# Altium PCB TC264.PcbDoc (part 2 of 2)
Units mil, origin at the board's own origin, x right, y up, seen from the top; angles counter-clockwise.
Board outline 6025.03 x 2675.03 mil, 2 copper layers (Top Layer, Bottom Layer); 160 components, 198 nets, 553 pads, 106 vias.
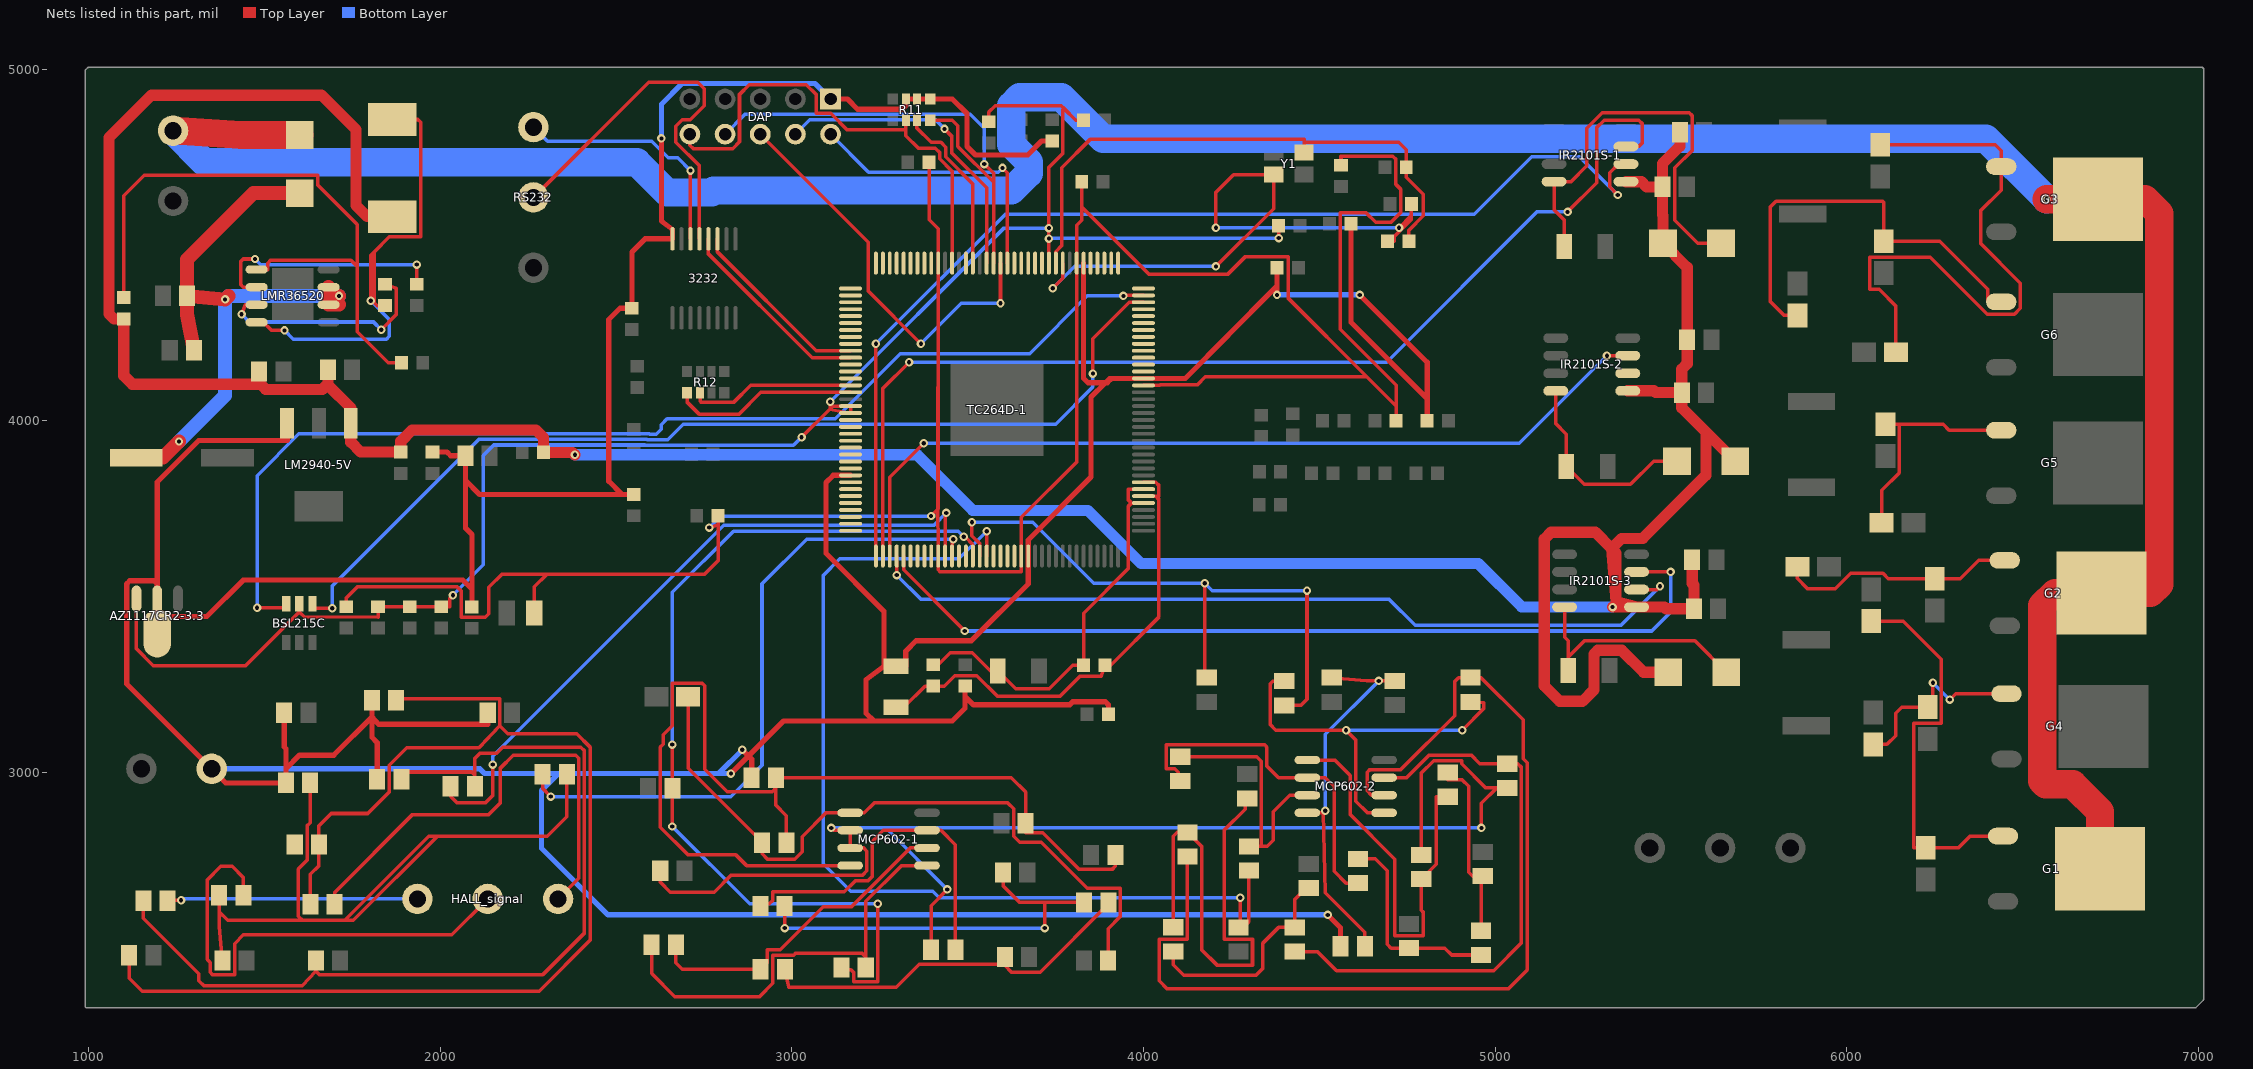
[diagram p2: the nets of this part, all layers, seen from the top]

## Via types
v1: diameter 24, hole 12, Top Layer to Bottom Layer, 106 vias

## Nets (pads, with @x,y where several pads share a name; then routed paths per layer and width w, separated by ;. In a path a pad name is that pad's centre, name@x,y a point inside that pad or via, vN(x,y) a via of type N, cw(c..) or ccw(c..) an arc to the next point about the centre after c; other vN are vias at no path point) (continued)
NetC15_2: C15.2 R1.1 TC264D-1.81 Y1.1 | length 1903.3
  Top Layer w10: v1(3742,4377) 3770.48,4405.48 TC264D-1.81@3770.48,4448.26 ; v1(4206,4439) 4370,4603 Y1.1@4370,4700 4256,4700 4206,4650 v1(4206,4549) ; R1.1@4694.37,4510 4713,4510 4713,4523.99 4762.01,4573 4762.01,4583.99 ; v1(4727.02,4549) 4762.01,4583.99 ; C15.2@4762.01,4616.5 4762.01,4583.99
  Bottom Layer w10: v1(3742,4377) 3804,4439 v1(4206,4439) ; v1(4206,4549) v1(4727.02,4549)
NetC16_2: C16.2 R1.2 TC264D-1.82 Y1.3 | length 1635.2
  Top Layer w10: TC264D-1.82@3750.79,4448.26 3750.79,4481 3768,4498.21 3768,4720 3848,4800 4456.61,4800 4456.61,4792 ; Y1.3@4456.61,4762.99 4456.61,4792 ; R1.2@4755,4510 4755,4542 4796,4583 4796,4644.32 4747.32,4693 C16.2@4747.32,4721.5 4747.32,4771 4726.32,4792 4456.61,4792
NetC53_1: C53.1 LMR36520.8 LV1.1 | length 1404.7
  Top Layer w10: LMR36520.8@1477.64,4280 1497,4280 1519,4258 1556,4258 v1(1557,4257) ; v1(1802,4341) 1802,4470 1812,4480 ; C53.1@1842.81,4327.44 1820.56,4327.44 1812,4336 1812,4480 ; LV1.1@1863.22,4856.74 1936,4856.74 1944,4848.74 1944,4523 1855,4523 1812,4480
  Bottom Layer w10: v1(1557,4257) 1582,4232 1847,4232 1855,4240 1855,4288 v1(1802,4341)
NetC53_2: C53.2 LMR36520.7 | length 646.7
  Top Layer w10: v1(1435,4302.65) 1445,4330 LMR36520.7@1477.64,4330 ; v1(1832,4259) 1875,4302 1875,4377.07 C53.2@1842.81,4388.07
  Bottom Layer w10: v1(1435,4302.65) 1456.83,4280.83 1810.17,4280.83 v1(1832,4259)
NetC54_2: C54.2 LMR36520.6 | length 679.7
  Top Layer w10: v1(1473,4460) 1440,4460 1432,4452 1432,4388 1440,4380 LMR36520.6@1477.64,4380 ; C54.2@1932.89,4388.07 v1(1932.89,4444)
  Bottom Layer w10: v1(1473,4460) 1489,4444 v1(1932.89,4444)
NetCD1_1: CD1.1 RD1.2 RD4.1 RD7.2 | length 2655.9
  Top Layer w10: RD4.1@1155.55,2635 1155.55,2585.45 1313.61,2427.39 1313.61,2407.39 1328,2393 1607.1,2393 1646.1,2434.9 ; CD1.1@1646.1,2465 1646.1,2434.9 ; RD1.2@1889.45,2980 1889.45,3001 2089.46,3001 2098.46,2992 ; RD7.2@2098.46,2960.79 2098.46,2992 ; 1646.1,2434.9 1656,2425 2292,2425 2410,2543 2410,3061 2400,3071 2178,3071 2161,3054 2113,3054 2098.46,3039.46 2098.46,2992
NetCD2_1: CD2.1 RD2.2 RD5.1 RD8.2 | length 2200.5
  Top Layer w10: RD5.1@1371.1,2650 1371.1,2603 ; CD2.1@1380.55,2465 1371.1,2561.45 1371.1,2603 ; RD2.2@1630,2970 1630,2857 1621,2848 1621,2750 1596,2725 1596,2591 1608,2579 ; RD8.2@2360,2995 2360,2874 2304,2818 1992,2818 ; 1371.1,2603 1395.1,2579 1608,2579 ; 1608,2579 1728,2579 ; 1728,2579 1967,2818 1992,2818 ; 1728,2579 1753,2579 1992,2818
NetCD3_1: CD3.1 RD3.2 RD6.1 RD9.2 | length 3572.2
  Top Layer w10: CD3.1@1115,2480 1115,2414 1152,2377 2281,2377 2426,2522 2426,3072 2388,3110 2192,3110 2169,3133 ; RD6.1@1630.55,2625 1630.55,2710 1655,2734.45 RD9.2@1655,2795 1655,2848 1690,2883 1794,2883 1855,2944 1855,3020 1904.77,3069.77 2110,3069.77 2169,3133 ; RD3.2@1874.45,3205 1874.45,3210 2169,3210 2169,3133
NetCM1_2: CM1.2 CM2.2 LM1.2 MCP602-1.8 RM1.2 | length 2948.5
  Top Layer w10: RM1.2@2984.45,2800 2984.45,2877 2954.45,2907 2954.45,2955.45 ; MCP602-1.8@3165.75,2735 2871,2735 2841,2765 2705,2765 2626,2844 2626,3072 2634,3080 2634,3107 2660,3133 2660,3254 2744,3254 2752,3246 2752,3009 2816,2945 2944,2945 2954.45,2955.45 ; CM1.2@3920,2765 3920,2733 3912,2725 3816,2725 3713,2828 3665,2828 CM2.2@3665,2855 3665,2944 3624,2985 LM1.2@2954.45,2985 2954.45,2955.45
NetCM3_2: CM3.2 MCP602-1.5 RM1.1 RM2.2 | length 2015.7
  Top Layer w10: CM3.2@2705,3215 2705,3011.45 2915.55,2800.9 RM1.1@2915.55,2800 2915.55,2768 2930.54,2753.01 3008,2753.01 3029.01,2774.03 3029.01,2817.01 3097,2885 MCP602-1.5@3165.75,2885 3206,2885 3234,2913 3614,2913 3631,2896 3631,2818 3648,2801 3709,2801 3840,2670 3933.84,2670 3933.84,2590.06 3899.45,2555.67 RM2.2@3899.45,2465
NetCM4_1: CM4.1 RM6.1 RM7.2 | length 1163.3
  Top Layer w10: v1(2979.45,2557) RM7.2@2979.45,2620 ; RM6.1@3600.55,2715 3600.55,2677.45 3648,2630 3719,2630 ; v1(3719,2557) 3719,2630 ; CM4.1@3831.1,2630 3719,2630
  Bottom Layer w10: v1(2979.45,2557) v1(3719,2557)
NetCM4_2: CM4.2 RM3.1 RM4.2 | length 1128.6
  Top Layer w10: RM4.2@2980,2440 2990.94,2389.06 3297.06,2389.06 3362,2454 RM3.1@3605.55,2454 ; CM4.2@3900,2630 3900,2625.45 3706.55,2432 3624.55,2432 RM3.1@3605.55,2451 ; RM3.1@3605.55,2451 RM3.1@3605.55,2475 RM3.1@3605.55,2454 ; RM3.1@3605.55,2451 RM3.1@3605.55,2454
NetCM11_2: CM11.2 CM12.2 LM2.2 MCP602-2.8 | length 1092.8
  Top Layer w10: MCP602-2.8@4465.75,2885 v1@4511,2885 ; v1(4517,2891) v1@4511,2885 ; CM11.2@4535,3269.45 4634.45,3260 v1(4669,3260) CM12.2@4715,3260 ; LM2.2@4629.45,2505 4629.45,2545 4517,2657.45 v1@4511,2885
  Bottom Layer w10: v1(4517,2891) 4517,3108 v1(4669,3260)
NetCM13_1: CM13.1 RM18.1 RM19.2 | length 585.7
  Top Layer w10: RM19.2@4610,2753.9 4659.1,2753.9 4693,2720 4693,2511 4704,2500 RM18.1@4755,2500 4857,2500 4876.45,2480.55 CM13.1@4960,2480.55
NetCM13_2: CM13.2 RM21.1 RM22.2 | length 532.4
  Top Layer w10: RM22.2@4865,2999.45 4865,2979 4906,2979 4925,2960 4925,2716 4936,2705 RM21.1@4960,2705 ; CM13.2@4960,2549.45 RM21.1@4960,2705 ; RM21.1@4965,2705 RM21.1@4960,2705
NetCM14_1: CM14.1 RM14.1 RM15.2 | length 625.7
  Top Layer w10: CM14.1@4085,2490.55 4085,2453 4114.62,2423.38 4320,2423.38 4339.72,2443.1 4339.72,2514.62 4384,2558.9 RM15.2@4430,2558.9 4430,2638.41 4462.15,2670.55 RM14.1@4470,2670.55
NetCM14_2: CM14.2 RM11.1 RM12.2 | length 1401.3
  Top Layer w10: CM14.2@4085,2559.45 4085,2818.45 4096,2829.45 RM12.2@4125,2829.45 4165,2789.45 4165,2496 4209,2452 4310,2452 4310,2525 4230.06,2525 4230.06,2836.06 4289,2895 4289,2926.1 RM11.1@4295,2926.1
NetCR3_1: CR3.1 DR1.2 IR2101S-1.8 | length 1213.3
  Top Layer w10: CR3.1@5196.34,4495 5196.34,4571.03 5167.64,4599.73 IR2101S-1.8@5167.64,4680 5216,4680 5261,4725 5261,4832 5305,4876 5552,4876 5560,4868 5560,4768 5511,4719 5511,4570 5576,4505 DR1.2@5642.68,4505
NetCR6_1: CR6.1 DR2.2 IR2101S-2.8 | length 590.5
  Top Layer w10: IR2101S-2.8@5172.64,4085 5172.64,3992.04 5202.68,3962 CR6.1@5202.68,3870 5253.68,3819 5385,3819 5451,3885 DR2.2@5517.32,3885
NetCR9_1: CR9.1 DR3.2 IR2101S-3.8 | length 690.3
  Top Layer w10: IR2101S-3.8@5197.64,3470 5197.64,3384.35 5207.99,3374 5207.99,3328 ; CR9.1@5207.99,3289.8 5207.99,3328 ; DR3.2@5657.68,3285 5568.45,3374.23 5254.22,3374.23 5207.99,3328
NetG1_1: G1.1 RW1.1 RW2.2 | length 1125.4
  Top Layer w10: RW1.1@6070,3430 6161,3430 6269,3322 6269,3140 6191,3140 6191,2785.55 RW2.2@6225,2785.55 6318,2785.55 6351.32,2818.87 G1.1@6444.45,2818.87
NetG2_1: G2.1 RW3.1 RW4.2 | length 681.5
  Top Layer w10: RW3.1@5859.45,3585 5859.45,3551.55 5888.43,3522.57 5967.57,3522.57 6011,3566 6103,3566 6118.45,3550.55 RW4.2@6250,3550.55 6323,3550.55 6375.41,3602.96 G2.1@6449.41,3602.96
NetG3_1: G3.1 RW5.1 RW6.2 | length 1688.7
  Top Layer w10: RW6.2@6095,4785 6422.41,4785 6439.41,4768 G3.1@6439.41,4722.96 6439,4722.96 6439,4656 6381,4598 6381,4504 6494,4391 6494,4320 6477,4303 6400,4303 6238,4465 6066,4465 6066,4374 6092,4374 6140,4326 RW5.1@6140,4195
NetG4_1: G4.1 RW7.1 RW8.2 | length 557.2
  Top Layer w10: RW7.1@6075,3079.45 6114.45,3079.45 6139,3104 6139,3168 6156.55,3185.55 RW8.2@6230,3185.55 6245,3185.55 v1(6245,3255) ; v1(6293,3207) 6309.87,3223.87 G4.1@6454.45,3223.87
  Bottom Layer w10: v1(6245,3255) v1(6293,3207)
NetG5_1: G5.1 RW9.1 RW10.2 | length 637
  Top Layer w10: RW9.1@6099.45,3710 6099.45,3802 6149,3851.55 6149,3990 ; RW10.2@6110,3990 6149,3990 ; G5.1@6439.41,3972.96 6291.04,3972.96 6274,3990 6149,3990
NetG6_1: G6.1 RW11.1 RW12.2 | length 1230
  Top Layer w10: RW11.1@5860,4299.45 5822.55,4299.45 5783,4339 5783,4608 5799,4624 6102,4624 6105,4621 RW12.2@6105,4510.55 6265,4510.55 6401.1,4374.45 6401.1,4337.96 G6.1@6439.41,4337.96
NetHALL_signal_1: HALL_signal.1 RD6.2 | length 1375.9
  Top Layer w10: RD6.2@1699.45,2625 1699.45,2658.45 1921,2880 2138,2880 2170,2912 2170,3011 2208,3049 2385,3049 2394,3040 2394,2699 HALL_signal.1@2335,2640
NetHALL_signal_2: HALL_signal.2 RD5.2 | length 1382.2
  Top Layer w10: RD5.2@1440,2650 1440,2701 1408,2733 1376,2733 1337,2694 1337,2467.8 1345.61,2459.2 1345.61,2431.39 1352,2425 1415,2425 1415,2513 1440,2538 2033,2538 HALL_signal.2@2135,2640
NetHALL_signal_3: HALL_signal.3 RD4.2 | length 713.2
  Top Layer w10: RD4.2@1224.45,2635 1224.45,2636 v1(1263,2636)
  Bottom Layer w10: v1(1263,2636) 1267,2640 HALL_signal.3@1935,2640
NetLMR36520_5: LMR36520.5 R51.1 R52.2 | length 1833.8
  Top Layer w10: R52.2@1100,4350 1100,4640 1158,4698 1651,4698 1651,4671 1764,4558 1764,4438 ; LMR36520.5@1477.64,4430 1509,4430 1509,4448 1517,4456 1746,4456 1764,4438 ; R51.1@1889.37,4165 1852,4165 1764,4253 1764,4438
NetMCP602-1_1: MCP602-1.1 RM5.1 RM9.2 | length 1224.7
  Top Layer w10: RM5.1@2601.1,2510 2601.1,2428 2667.1,2362 2908,2362 2946,2400 2946,2479.94 3005,2479.94 3010.06,2485 3200,2485 3210,2475 ; RM9.2@3210,2445 3210,2475 ; MCP602-1.1@3384.25,2735 3312,2735 3210,2633 3210,2475
NetMCP602-1_2: MCP602-1.2 RM4.1 RM5.2 | length 938.6
  Top Layer w10: RM5.2@2670,2510 2670,2458 2688,2440 RM4.1@2911.1,2440 2929.55,2458.45 2929.55,2495.94 2967.04,2495.94 3088.87,2617.77 3169.58,2617.77 3336.81,2785 MCP602-1.2@3384.25,2785
NetMCP602-1_3: MCP602-1.3 RM7.1 RM8.2 | length 1036.3
  Top Layer w10: RM7.1@2910.55,2620 2910.55,2626 2936,2626 2945,2635 2945,2659.94 3148.94,2659.94 3180.11,2691.11 3216.27,2691.11 3229.17,2704 3229.17,2804.17 3260,2835 MCP602-1.3@3384.25,2835 3424,2835 3465,2794 RM8.2@3465,2495
NetMCP602-2_1: MCP602-2.1 RM13.1 RM17.2 | length 1160.5
  Top Layer w10: RM17.2@4400,3259.45 4368,3259.45 4360,3251.45 4360,3136 4376,3120 v1(4576,3120) 4604,3092 4604,2918 4637,2885 MCP602-2.1@4684.25,2885 ; v1(4906.45,3120) 4968,3181.55 4968,3197.55 RM13.1@4930,3200.55
  Bottom Layer w10: v1(4576,3120) v1(4906.45,3120)
NetMCP602-2_2: MCP602-2.2 RM12.1 RM13.2 | length 2995.7
  Top Layer w10: RM12.1@4125,2760.55 4125,2525 4045,2525 4045,2407 4068,2384 5037,2384 5091,2438 5091,3027.53 5080,3038.53 5080,3149.45 4960,3269.45 RM13.2@4930,3269.45 4896,3269.45 4885,3258.45 4885,3161 4732,3008 4644,3008 4636,3000 4636,2947.59 4648.59,2935 MCP602-2.2@4684.25,2935
NetMCP602-2_3: MCP602-2.3 RM15.1 RM16.2 | length 1631
  Top Layer w10: RM15.1@4430,2490 4495,2490 4549,2436 4996,2436 5075,2515 5075,3013.87 5064.43,3024.45 RM16.2@5035,3024.45 4956.55,3024.45 4931.72,3049.28 4812.28,3049.28 4748,2985 MCP602-2.3@4684.25,2985
NetMCP602-2_5: MCP602-2.5 RM22.1 RM23.1 | length 1176.5
  Top Layer w10: MCP602-2.5@4465.75,3035 4544,3035 4588,2991 4588,2880 4715,2753 4715,2535 4795,2535 4795,2603 4790,2608 RM23.1@4790,2696.1 4833,2739.1 4833,2930.55 RM22.1@4865,2930.55
NetMCP602-2_6: MCP602-2.6 RM19.1 RM20.1 | length 1017.1
  Top Layer w10: RM20.1@4105,2975.55 4099,2975.55 4099,3000 4088.39,3010.61 4065.06,3010.61 4065.06,3078.28 4344.72,3078.28 4351,3072 4351,3018 4384,2985 MCP602-2.6@4465.75,2985 4517,2985 4542,2960 4542,2719 4576,2685 RM19.1@4610,2685
NetMCP602-2_7: MCP602-2.7 RM20.2 RM24.2 | length 751.5
  Top Layer w10: RM20.2@4105,3044.45 4322.55,3044.45 4335,3032 4335,2789.45 ; RM24.2@4300,2789.45 4335,2789.45 ; MCP602-2.7@4465.75,2935 4416,2935 4369,2888 4369,2806.45 4352,2789.45 4335,2789.45
NetR11_3: R11.3 TC264D-1.94 | length 488.4
  Top Layer w10: R11.3@3355.75,4854.69 3355.75,4832.25 3396.36,4791.64 3424,4791.64 3437.4,4778.24 3437.4,4750.6 3514.57,4673.43 TC264D-1.94@3514.57,4448.26
P00_3: TC264D-1.14
P00_7: TC264D-1.18
P00_8: TC264D-1.19
P00_9: TC264D-1.20
P00_12: TC264D-1.21
P02_0: IR2101S-1.2 TC264D-1.1 | length 3108.6
  Top Layer w10: TC264D-1.1@3238.98,3615.2 v1(3238.98,4218.98) ; v1(5349,4642) 5325.93,4665.07 5325.93,4704.93 5351,4730 IR2101S-1.2@5372.36,4730
  Bottom Layer w10: v1(3238.98,4218.98) 3607.37,4587.37 4940.37,4587.37 5104,4751 5240,4751 v1(5349,4642)
P02_1: IR2101S-1.3 TC264D-1.2 | length 3153.8
  Top Layer w10: TC264D-1.2@3258.67,3615.2 3258.67,4091.87 v1(3333.41,4166.61) ; v1(5206,4594) 5289,4677 5289,4834 5310,4855 5408,4855 5419,4844 5419,4791 5408,4780 IR2101S-1.3@5372.36,4780
  Bottom Layer w10: v1(3333.41,4166.61) 4691.61,4166.61 5119,4594 v1(5206,4594)
P02_6: TC264D-1.7
P02_7: TC264D-1.8
P02_8: TC264D-1.9
P10_1: TC264D-1.140
P10_2: TC264D-1.141
P10_3: TC264D-1.142
P10_5: TC264D-1.143
P10_6: TC264D-1.144
P11_2: TC264D-1.132
P11_3: TC264D-1.133
P11_6: TC264D-1.134
P11_9: TC264D-1.135
P11_10: TC264D-1.137
P11_11: TC264D-1.138
P11_12: TC264D-1.139
P13_0: TC264D-1.128
P13_1: TC264D-1.129
P13_2: TC264D-1.130
P13_3: TC264D-1.131
P14_0: 3232.11 TC264D-1.118 | length 532.1
  Top Layer w10: 3232.11@2788.39,4517.2 2788.39,4480 3069.34,4199.05 TC264D-1.118@3166.94,4199.05
P14_1: 3232.12 TC264D-1.119 | length 569.3
  Top Layer w10: 3232.12@2762.8,4517.2 2762.8,4474.2 3057.63,4179.37 TC264D-1.119@3166.94,4179.37
P14_2: TC264D-1.120
P14_3: TC264D-1.121
P14_4: TC264D-1.122
P14_5: R12.6 TC264D-1.123 | length 473.7
  Top Layer w10: R12.6@2739.25,4079.68 2739.25,4055.02 2742.27,4052 2834,4052 2882.63,4100.63 TC264D-1.123@3166.94,4100.63
P14_6: R12.5 TC264D-1.124 | length 531.4
  Top Layer w10: R12.5@2701.85,4079.68 2701.85,4053.15 2736,4019 2850,4019 2911.94,4080.94 TC264D-1.124@3166.94,4080.94
P15_0: TC264D-1.109
P15_1: TC264D-1.110
P15_2: TC264D-1.111
P15_3: TC264D-1.112
P15_4: TC264D-1.113
P15_5: TC264D-1.114
P15_6: TC264D-1.115
P15_7: TC264D-1.116
P15_8: TC264D-1.117
P20_3: TC264D-1.95
P20_6: TC264D-1.100
P20_7: TC264D-1.101
P20_8: TC264D-1.102
P20_9: TC264D-1.103
P20_10: TC264D-1.104
P20_11: TC264D-1.105
P20_12: TC264D-1.106
P20_13: TC264D-1.107
P20_14: TC264D-1.108
P21_2: TC264D-1.84
P21_3: TC264D-1.85
P21_4: TC264D-1.86
P21_5: TC264D-1.87
P21_6: TC264D-1.88
P22_0: TC264D-1.74
P22_1: TC264D-1.75
P22_2: TC264D-1.76
P22_3: TC264D-1.77
P23_1: TC264D-1.73
P32_4: TC264D-1.72
P33_4: TC264D-1.60
P33_5: TC264D-1.61
P33_6: TC264D-1.62
P33_7: TC264D-1.63
P33_8: TC264D-1.64
P33_9: TC264D-1.65
P33_10: TC264D-1.66
P33_11: TC264D-1.67
P33_12: TC264D-1.68
P33_13: TC264D-1.69
P_SCI0_RX: 3232.13 RS232.2 | length 1131.8
  Top Layer w10: RS232.2@2265,4635 2593,4963 2732,4963 2751,4944 2751,4896 2711,4856 2688,4856 2669.47,4837.47 2669.47,4792.53 2737.2,4724.8 3232.13@2737.2,4517.2
P_SCI0_TX: 3232.14 RS232.1 | length 692
  Top Layer w10: 3232.14@2711.61,4517.2 v1(2711.61,4711.39)
  Bottom Layer w10: RS232.1@2265,4835 2305,4795 2601,4795 2648,4748 2675,4748 v1(2711.61,4711.39)
PAD01: CM5.2 RM9.1 TC264D-1.15 | length 2675.3
  Top Layer w10: v1(2660,2846) CM5.2@2660,2955 v1(2660,3079) ; RM9.1@3141.1,2445 3141.1,2439 3168,2439 3176.16,2430.84 3176.16,2405.06 3244,2405.06 v1(3244,2626) ; v1(3489,3670) 3492.57,3670 3514.57,3648 TC264D-1.15@3514.57,3615.2
  Bottom Layer w10: v1(2660,2846) 2880,2626 v1(3244,2626) ; v1(2660,3079) 2660,3512.03 2833.97,3686 3473,3686 v1(3489,3670)
PAD02: CM15.2 RM17.1 TC264D-1.16 | length 1794.4
  Top Layer w10: v1(3512,3711) 3512,3673.2 3534.26,3650.94 TC264D-1.16@3534.26,3615.2 ; v1(4174,3538) 4174,3269.45 CM15.2@4180,3269.45 ; RM17.1@4400,3190.55 4448,3190.55 4465,3207.55 v1(4465,3517)
  Bottom Layer w10: v1(3512,3711) 3685,3711 3858,3538 v1(4174,3538) 4195,3517 v1(4465,3517)
PAD03: CM16.2 RM24.1 TC264D-1.17 | length 2900
  Top Layer w10: TC264D-1.17@3553.94,3615.2 v1(3553.94,3686) ; CM16.2@4270,2558.9 CM16.2@4275,2558.9 ; v1(4275,2643.18) CM16.2@4275,2558.9 ; RM24.1@4300,2720.55 4300,2575.95 4282.95,2558.9 CM16.2@4275,2558.9
  Bottom Layer w10: v1(3553.94,3686) 3474.94,3607 3136,3607 3089,3560 3089,2740 3167,2662 3400.18,2662 3419,2643.18 v1(4275,2643.18)
PORST: DAP.10 R11.2 TC264D-1.97 | length 1377.8
  Top Layer w10: DAP.10@2710,4815 2710,4784 2720,4774 2832,4774 2851,4793 2851,4928 2879,4956 3041,4956 3069,4928 3069,4874 3110,4874 3157,4827 3324.25,4827 ; R11.2@3324.25,4854.69 3324.25,4827 ; TC264D-1.97@3455.52,4448.26 3455.52,4709.85 3420,4745.37 3420,4763 3408,4775 3360,4775 3324.25,4810.75 3324.25,4827
PT0: RD7.1 TC264D-1.11 | length 1977.5
  Top Layer w10: RD7.1@2029.57,2960.79 2029.57,2931.43 2048,2913 2128,2913 2149,2934 v1(2149,3022) ; TC264D-1.11@3435.83,3615.2 3435.83,3734.66 v1(3439,3737.83)
  Bottom Layer w10: v1(2149,3022) 2149,3045.71 2806.29,3703 3404.17,3703 v1(3439,3737.83)
PT1: RD8.1 TC264D-1.12 | length 1873.2
  Top Layer w10: RD8.1@2291.1,2995 2291.1,2953.9 v1(2314,2931) ; TC264D-1.12@3455.52,3615.2 3455.52,3659.52 v1(3459,3663)
  Bottom Layer w10: v1(2314,2931) 2826.03,2931 2915,3019.97 2915,3536 3042,3663 v1(3459,3663)
PT2: RD9.1
PT3: TC264D-1.13
PWM2: IR2101S-2.2
PWM3: IR2101S-2.3 TC264D-1.3 | length 2466.3
  Top Layer w10: TC264D-1.3@3278.35,3615.2 3278.35,3839.35 v1(3375,3936) ; v1(5318,4185) IR2101S-2.3@5377.36,4185
  Bottom Layer w10: v1(3375,3936) 5069,3936 v1(5318,4185)
PWM4: IR2101S-3.2 TC264D-1.4 | length 2400.7
  Top Layer w10: v1(3298.04,3561) TC264D-1.4@3298.04,3615.2 ; IR2101S-3.2@5402.36,3520 5460,3520 v1(5469,3529)
  Bottom Layer w10: v1(3298.04,3561) 3366.04,3493 4698,3493 4773,3418 5358,3418 v1(5469,3529)
PWM5: IR2101S-3.3 TC264D-1.5 | length 2525.6
  Top Layer w10: TC264D-1.5@3317.72,3615.2 3317.72,3576 v1(3491.72,3402) ; IR2101S-3.3@5402.36,3570 v1(5499,3570)
  Bottom Layer w10: v1(3491.72,3402) 5445,3402 5499,3456 v1(5499,3570)
PWM6: TC264D-1.6
REF_2.5V: CM6.1 MCP602-1.6 MCP602-1.7 RM8.1 RM16.1 RM23.2 | length 3820.2
  Top Layer w10: CM6.1@2625.55,2720 2625.55,2688 2654.55,2659 2779,2659 2828,2708 3201.17,2708 3213.17,2720 3213.17,2776 3204.17,2785 MCP602-1.7@3165.75,2785 MCP602-1.6@3165.75,2835 3119,2835 v1(3112,2842) ; RM8.1@3396.1,2495 3396.1,2621.1 v1(3442,2667) ; RM23.2@4790,2765 4790,2998.28 4825,3033.28 4905,3033.28 4905,3024 4973.45,2955.55 5004.55,2955.55 ; v1(4961,2842) 4961,2912 5004.55,2955.55 ; RM16.1@5035,2955.55 5004.55,2955.55
  Bottom Layer w10: v1(3112,2842) 3267,2842 ; v1(3442,2667) 3267,2842 ; v1(4961,2842) 3267,2842
TCK: DAP.4 TC264D-1.92 | length 882.8
  Top Layer w10: v1(3434,4830) 3454.03,4809.97 3454.03,4762.39 3553.94,4662.48 TC264D-1.92@3553.94,4448.26
  Bottom Layer w10: DAP.4@3010,4815 3050.53,4855.53 3408.47,4855.53 v1(3434,4830)
TDO: DAP.6 TC264D-1.90 | length 1173.5
  Top Layer w10: DAP.6@2910,4815 3217,4508 3217,4369 v1(3367,4219) ; v1(3593.31,4334) TC264D-1.90@3593.31,4448.26
  Bottom Layer w10: v1(3367,4219) 3482,4334 v1(3593.31,4334)
TMS: DAP.2 TC264D-1.89 | length 815.2
  Top Layer w10: v1(3599,4719) 3613,4705 TC264D-1.89@3613,4448.26
  Bottom Layer w10: DAP.2@3110,4815 3218,4707 3587,4707 v1(3599,4719)
TRST: DAP.8 R11.4 TC264D-1.91 | length 1459.6
  Top Layer w10: R11.4@3393.15,4854.69 3456.31,4854.69 3472,4839 3472,4780 3573.63,4678.37 ; v1(3547,4730) 3573.63,4703.37 3573.63,4678.37 ; TC264D-1.91@3573.63,4448.26 3573.63,4678.37
  Bottom Layer w10: DAP.8@2810,4815 2866.53,4871.53 3507.47,4871.53 3547,4832 v1(3547,4730)
"VC 1V3": C1.1 C2.2 C3.2 C4.2 C8.1 CW6.2 L11.2 TC264D-1.10 TC264D-1.22 TC264D-1.58 TC264D-1.79 TC264D-1.99 | length 8733.9
  Top Layer w10: CW6.2@1732.87,3470.94 1732.87,3496 1764.13,3527.25 2048,3527.25 2059,3516.25 2059,3441 2128,3441 2138.04,3451.04 2138.04,3526.04 2176,3564 2304,3564 ; L11.2@2267.4,3452.76 2267.4,3527.4 2304,3564 ; v1(2765,3696) 2790,3704 ; C4.2@3390.32,4735 3390.32,4571.68 3416.15,4545.85 TC264D-1.99@3416.15,4448.26 ; v1(3396,3729) 3414.99,3747.99 ; C8.1@3824.37,4680 3824.37,4608 ; TC264D-1.58@4000,4100.63 4045.82,4100.63 4047,4101.81 4152.81,4101.81 4176,4125 4635,4125 ; C3.2@4561.69,4726.5 4561.69,4752.69 4709.31,4752.69 4718,4744 4718,4672 4731,4659 4731,4591.62 4704,4564.62 4660.38,4564.62 4634,4591 4560,4591 4560,4260 4718.58,4101.42 4718.58,4041.42 ; C2.2@4718.58,3999.96 4718.58,4041.42 ; 2304,3564 2752,3564 2790,3602 ; 2790,3602 C1.1@2790,3730 2790,3704 ; 2790,3602 2790,3704 ; 3414.99,3747.99 TC264D-1.99@3416.15,4448.26 ; 3414.99,3747.99 3416.15,3642.88 TC264D-1.10@3416.15,3615.2 3416.15,3575.85 3421,3571 3652.37,3571 TC264D-1.22@3652.37,3615.2 3652.37,3725.19 3809.85,3882.67 TC264D-1.79@3809.85,4448.26 3809.85,4556 3824.37,4570.52 3824.37,4608 ; 3414.99,3747.99 3416.15,3749.15 TC264D-1.99@3416.15,4448.26 ; 3824.37,4608 4016.37,4416 4239,4416 4290,4467 4411,4467 4411,4349 4635,4125 ; 4635,4125 4718.58,4041.42
  Bottom Layer w10: v1(2765,3696) 2798,3729 v1(3396,3729)
"VC 3V3": AZ1117CR2-3.3.3 BSL215C.2 C5.2 C6.1 C7.1 CW5.2 CW11.2 CW12.2 TC264D-1.83 TC264D-1.126 TC264D-1.127 | length 5145
  Top Layer w10: AZ1117CR2-3.3.3@1135.94,3493.94 1135.94,3351.06 1184,3303 1446.09,3303 1599.09,3456 ; BSL215C.2@1599.09,3479.35 1599.09,3456 ; v1(2036,3504) 2027,3495 2027,3470.94 CW11.2@2003.11,3470.94 CW12.2@1913.03,3470.94 CW5.2@1822.95,3470.94 1822.95,3441 1613,3442.09 1599.09,3456 ; v1(3027.43,3953) 3109,4034.57 ; v1(3109,4053.89) 3109,4034.57 ; C5.2@3560,4850.32 3560,4878 3577.95,4895.95 3766.05,4895.95 3774.03,4887.97 ; TC264D-1.83@3731.11,4448.26 v1(3731.11,4518) v1(3731.11,4548) 3731.11,4721.11 3771,4761 3771,4884.95 3774.03,4887.97 ; C6.1@3829.29,4854.96 3807.04,4854.96 3774.03,4887.97 ; v1(4384.37,4519.63) C7.1@4384.37,4555 ; 3109,4034.57 3116,4041.57 TC264D-1.126@3166.94,4041.57 TC264D-1.127@3166.94,4021.89 3109,4032 3109,4034.57
  Bottom Layer w10: v1(2036,3504) 2122,3590 2122,3901 2152,3931 2581.22,3931 2582.22,3930 3004.43,3930 v1(3027.43,3953) ; v1(3109,4053.89) 3603.11,4548 v1(3731.11,4548) ; v1(3731.11,4518) 3732.74,4519.63 v1(4384.37,4519.63)
"VC 5V": 3232.16 AZ1117CR2-3.3.2 C9.1 C10.1 C11.2 C13.1 C21.1 C22.1 CD4.1 CD5.1 CW3.1 CW4.2 CW10.2 DAP.1 HALL_PWR.2 LB2.2 LM1.1 LM2.1 LM2940-5V.3 R11.5 R11.6 R11.7 RD1.1 RD2.1 RD3.1 TC264D-1.23 TC264D-1.59 TC264D-1.78 TC264D-1.136 TX_C_1.2 TX_C_5.2 | length 17632.7
  Top Layer w15: AZ1117CR2-3.3.2@1195,3395.51 1195,3442 AZ1117CR2-3.3.2@1195,3443 ; CD5.1@1556.1,3170 1556.1,3072 1561.1,3067 1561.1,3010.1 ; LM2940-5V.3@1564.45,3993.11 1564.45,3944 1313,3944 1195,3826 1195,3536 ; RD3.1@1805.55,3205 1805.55,3157.55 ; RD1.1@1820.55,2980 1820.55,3085 1805.55,3100 1805.55,3157.55 ; CW4.2@1977.84,3910.94 2019,3910.94 2029.63,3900.31 CW3.1@2071.46,3900.31 2071.46,3830.86 ; CW10.2@2090,3470.32 2090,3521 ; CD4.1@2135,3170 2135,3137 1824,3137 1805.55,3157.55 ; TX_C_1.2@2550,3790.32 2517,3790.32 ; v1(2629,4803) 2629,4568 2660.43,4544 3232.16@2660.43,4517.2 2582.2,4517.2 2545,4480 TX_C_5.2@2545,4320 2511.21,4320 2479.21,4288 2479.21,3828.11 2517,3790.32 ; v1(2826.5,2996.5) 2876.5,3046.5 ; LM1.1@2885.55,2985 2885.55,3037.45 ; DAP.1@3110,4915 3158,4915 3187,4886 3314.25,4886 3324.25,4896 R11.7@3324.25,4915.32 R11.6@3355.75,4915.32 R11.5@3393.15,4915.32 3456,4915.32 3498,4873.32 3498,4780.16 3522.16,4756 3670.69,4756 3710,4795.31 C13.1@3740.2,4795.31 ; TC264D-1.136@3166.94,3844.72 3117.72,3844.72 3097,3824 3097,3623 3262,3458 LB2.2@3262,3302.01 ; TC264D-1.78@3829.53,4448.26 3829.53,4120.78 3842.23,4108.08 3891.77,4108.08 ; C21.1@3900.32,3165 3900.32,3192 3891.32,3201 3799,3201 3790,3192 3516.48,3192 3492.48,3216 ; v1(4379.69,4358) 4379.69,4383.69 ; C9.1@4379.69,4435 4379.69,4383.69 ; v1(4523.88,2594.67) 4560.55,2558 LM2.1@4560.55,2505 ; C11.2@4590,4560 4590,4280 4806.69,4063.31 ; v1(4615,4358) 4806.69,4166.31 4806.69,4063.31 ; C10.1@4806.69,3999.96 4806.69,4063.31 ; AZ1117CR2-3.3.2@1195,3443 1336,3443 1440,3547 2064,3547 2090,3521 ; AZ1117CR2-3.3.2@1195,3443 AZ1117CR2-3.3.2@1195,3490 1195,3536 ; 1195,3536 1186,3545 1117,3545 1108,3536 1108,3252 HALL_PWR.2@1350,3010 1390,2970 RD2.1@1561.1,2970 1561.1,3010.1 ; 1561.1,3010.1 1600,3049 1697,3049 1805.55,3157.55 ; 2071.46,3830.86 2112,3790.32 2517,3790.32 ; 2071.46,3830.86 2071.46,3694.54 2090,3676 2090,3521 ; 2876.5,3046.5 2976,3146 3233,3146 ; 2876.5,3046.5 v1(2859,3064) 2885.55,3037.45 ; 2876.5,3046.5 2885.55,3037.45 ; 3233,3146 3211,3168 3211,3264 LB2.2@3262,3302.01 ; 3233,3146 3456,3146 3492.48,3182.48 ; LB2.2@3262,3302.01 LB2.2@3296.18,3302.01 3324.12,3302.01 3324.12,3345.01 3353.61,3374.5 3510.5,3374.5 3672.05,3536.05 TC264D-1.23@3672.05,3615.2 3672.05,3661.05 3851,3840 3851,4067.31 3891.77,4108.08 ; 3492.48,3182.48 C22.1@3492.48,3245.31 3492.48,3216 ; 3492.48,3182.48 3492.48,3216 ; 3891.77,4108.08 3904,4120.31 3908.74,4120.31 ; 3891.77,4108.08 3896.51,4108.08 3908.74,4120.31 ; 3908.74,4120.31 TC264D-1.59@4000,4120.31 4118.61,4120.31 4366.84,4370.73 4379.69,4383.69
  Bottom Layer w15: HALL_PWR.2@1350,3010 2112.5,3010 2126,2996.5 2336,2996.5 ; v1(2629,4803) 2629,4900 2688,4959 3066,4959 DAP.1@3110,4915 ; v1(2826.5,2996.5) 2791.5,2996.5 ; v1(2859,3064) 2791.5,2996.5 ; v1(4379.69,4358) v1(4615,4358) ; v1(4523.88,2594.67) 2477.33,2594.67 2288,2784 2288,2948.5 2336,2996.5 ; 2336,2996.5 2791.5,2996.5
"VC 7V": C55.1 C56.1 CR1.1 CR2.1 CR4.1 CR5.1 CR7.1 CR8.1 CW1.2 CW2.2 DR1.1 DR2.1 DR3.1 IR2101S-1.1 IR2101S-2.1 IR2101S-3.1 LM2940-5V.1 LV1.2 R52.1 | length 10301.9
  Top Layer w32: C56.1@1485,4140 1485,4108 ; C55.1@1680.55,4145 1680.55,4105.55 ; LV1.2@1863.22,4580.52 1792,4580.52 1760,4612.52 1760,4828 1662,4926 1179,4926 1058,4805 1058,4303.37 1072,4289.37 R52.1@1100,4289.37 1100,4128 1124,4104 1485,4104 1485,4108 ; v1(2383,3903) 2376.04,3909.96 CW1.2@2293.62,3909.96 2293.62,3952.38 2272,3974 1920,3974 1887.76,3941.76 CW2.2@1887.76,3910.94 1773.61,3910.94 1745.55,3939 LM2940-5V.1@1745.55,3993.11 1745.55,4036 1680.55,4101 1680.55,4105.55 ; v1(5334,3470) 5360,3470 ; IR2101S-1.1@5372.36,4680 5416,4680 5431,4665 CR2.1@5476.1,4665 ; IR2101S-2.1@5377.36,4085 5451,4085 5456,4080 CR5.1@5531.1,4080 ; DR3.1@5492.32,3285 5422.23,3285 5360,3347.23 5292.23,3347.23 5281,3336 5281,3235 5248,3202 5184,3202 5140,3246 5140,3664 5159,3683 5285,3683 5331.5,3636.5 ; CR1.1@5525.55,4820 5525.55,4780.81 5476.1,4731.36 CR2.1@5476.1,4665 ; CR7.1@5560.55,3605 5560.55,3537 5565.55,3532 CR8.1@5565.55,3465 5486,3465 5481,3470 IR2101S-3.1@5402.36,3470 ; DR2.1@5682.68,3885 5600,3967.68 ; 1485,4108 1504,4089 1664,4089 1680.55,4105.55 ; 5331.5,3636.5 5344,3486 ; 5331.5,3636.5 5360,3665 5419.69,3665 5600,3845.31 5600,3967.68 ; 5331.5,3636.5 5344,3624 5344,3486 ; 5344,3486 IR2101S-3.1@5402.36,3470 ; 5344,3486 5360,3470 ; 5360,3470 IR2101S-3.1@5402.36,3470 ; CR2.1@5476.1,4665 5476.1,4585.22 5477.32,4584 DR1.1@5477.32,4505 5546.1,4436.22 CR4.1@5546.1,4230 5546.1,4162 5531.1,4147 CR5.1@5531.1,4080 ; CR5.1@5531.1,4080 5531.1,4036.58 5600,3967.68
  Bottom Layer w32: v1(2383,3903) 3356.55,3903 3514.55,3745 3841.85,3745 3992.85,3594 4952,3594 5076,3470 v1(5334,3470)
"VCC 24V": C51.2 C52.2 CV0.1 DV00.2 LMR36520.2 LMR36520.3 | length 1842.3
  Top Layer w40: CV0.1@1135.55,3895 1211,3895 v1(1257,3941) ; C52.2@1299.45,4200 1280,4302.45 C51.2@1280,4355 ; 1398,4355 v1(1388,4345) C51.2@1280,4355 ; DV00.2@1600,4647.32 1468.32,4647.32 1280,4459 C51.2@1280,4355 ; LMR36520.3@1682.36,4380 1682.36,4355 ; v1(1712,4355) 1682.36,4355 ; 1682.36,4355 LMR36520.2@1682.36,4330 1712,4330 1699.68,4340.39 1694.68,4344.61 1682.36,4355
  Bottom Layer w40: v1(1257,3941) 1388,4072 v1(1388,4345) ; 1398,4355 v1(1712,4355)
"VCC 24V IN": DV00.1 G1.2 G2.2 G3.2 POWER_24V.2 | length 8787.8
  Top Layer w80: POWER_24V.2@1240,4825 1432.32,4812.68 DV00.1@1600,4812.68 ; v1(6568,4630) G3.2@6715,4630 6848,4630 6889,4589 6889,3535 6864,3510 G2.2@6725,3510 6592,3510 6556,3474 6556,2976 6566,2966 6642.81,2966 6720.04,2888.77 G1.2@6720.04,2725.91
  Bottom Layer w80: POWER_24V.2@1240,4825 1330,4735 2559.78,4735 2645.43,4649.35 2772.2,4649.35 2777.23,4654.37 3624.36,4654.37 3673.99,4704 3673.99,4736 3624,4785.99 3624,4896 3648,4920 3767,4920 3885,4802 6396,4802 v1(6568,4630)
VDDA: C23.1 C24.2 LB2.1 TC264D-1.42 TC264D-1.44 | length 1381.7
  Top Layer w10: LB2.1@3296.18,3184.69 3318,3184.69 3378.63,3245.31 C23.1@3402.4,3245.31 3433.37,3245.31 3463.06,3275 3526,3275 3584,3217 3763.42,3217 3820.42,3274 3880,3274 C24.2@3890.32,3305 3907,3305 4044,3442 4044,3776 4034.33,3785.67 ; TC264D-1.42@4000,3785.67 4034.33,3785.67 ; TC264D-1.44@4000,3825.04 4034.96,3825.04 4044,3816 4044,3785.67 4034.33,3785.67
VGATE1N: BSL215C.1 TC264D-1.70 | length 2854.1
  Top Layer w10: BSL215C.1@1636.5,3479.35 1636.5,3467 v1(1693,3467) ; v1(3856,4134) 3856,4233 3959.85,4336.85 TC264D-1.70@4000,4336.85
  Bottom Layer w10: v1(1693,3467) 1693,3530 2110,3947 2587.85,3947 2588.85,3946 2647.08,3946 2691.08,3990 3750,3990 3856,4096 v1(3856,4134)
VGATE1P: BSL215C.3 TC264D-1.71 | length 3212.1
  Top Layer w10: v1(1479,3468) 1561.69,3468 BSL215C.3@1561.69,3479.35 ; v1(3943,4355) 3944.53,4356.53 TC264D-1.71@4000,4356.53
  Bottom Layer w10: v1(1479,3468) 1479,3844 1598,3963 2594.47,3963 2595.47,3962 2614.53,3962 2628,3975.47 2628,3989 2645,4006 3123,4006 3308,4191 3676,4191 3840,4355 v1(3943,4355)
VSSA: C23.2 C24.1 LB3.1 TC264D-1.41 TC264D-1.43 | length 1150.3
  Top Layer w10: C23.2@3402.4,3305.94 3416.69,3305.94 3450.75,3340 3513,3340 3564.18,3288.82 LB3.1@3585.51,3288.82 3636.33,3238 3732,3238 3799,3305 C24.1@3829.69,3305 3829.69,3453 3956,3579.31 3956,3755.96 3966.02,3765.98 ; TC264D-1.41@4000,3765.98 3966.02,3765.98 ; TC264D-1.43@4000,3805.35 3956,3805.35 3956,3776 3966.02,3765.98
pads on no net: 3232.7 3232.8 3232.9 3232.10 LMR36520.4 R11.1 R11.8 R12.1 R12.2 R12.7 R12.8 RM2.1 TC264D-1.93 TC264D-1.96 TC264D-1.98

## Polygon pours and split planes (outlines as drawn)
GH1- on Top Layer "Bottom Layer-GND" (solid, remove dead copper, pour order 0): 999.19,5017.81 7019.19,5017.81 7019.19,2387.81 7009.19,2377.81 6974.19,2342.81 989.19,2342.81
GH1- on Bottom Layer "Bottom Layer-GND" (solid, remove dead copper, pour order 2): 1005,5015 7025,5015 7025,2385 7015,2375 6980,2340 995,2340

## Silkscreen, mask and mechanical layers (free items; w line width, h text height)
Mechanical 1:
  lines w10: 995,2335 6990,2335 7010,2355 7010,4970 1020,4970 995,4995 995,2340

## Text inside footprints (layer, text, board x,y; h text height)
DAP: Top Overlay "2" at 3180,4840 h18 r180; Top Overlay "1" at 3160,4940 h18 r180; Top Overlay "9" at 2620,4940 h18 r180; Top Overlay "10" at 2620,4840 h18 r180